# EAGLE board Varella_Std - v.1.0 (EAGLE 9.5.2)
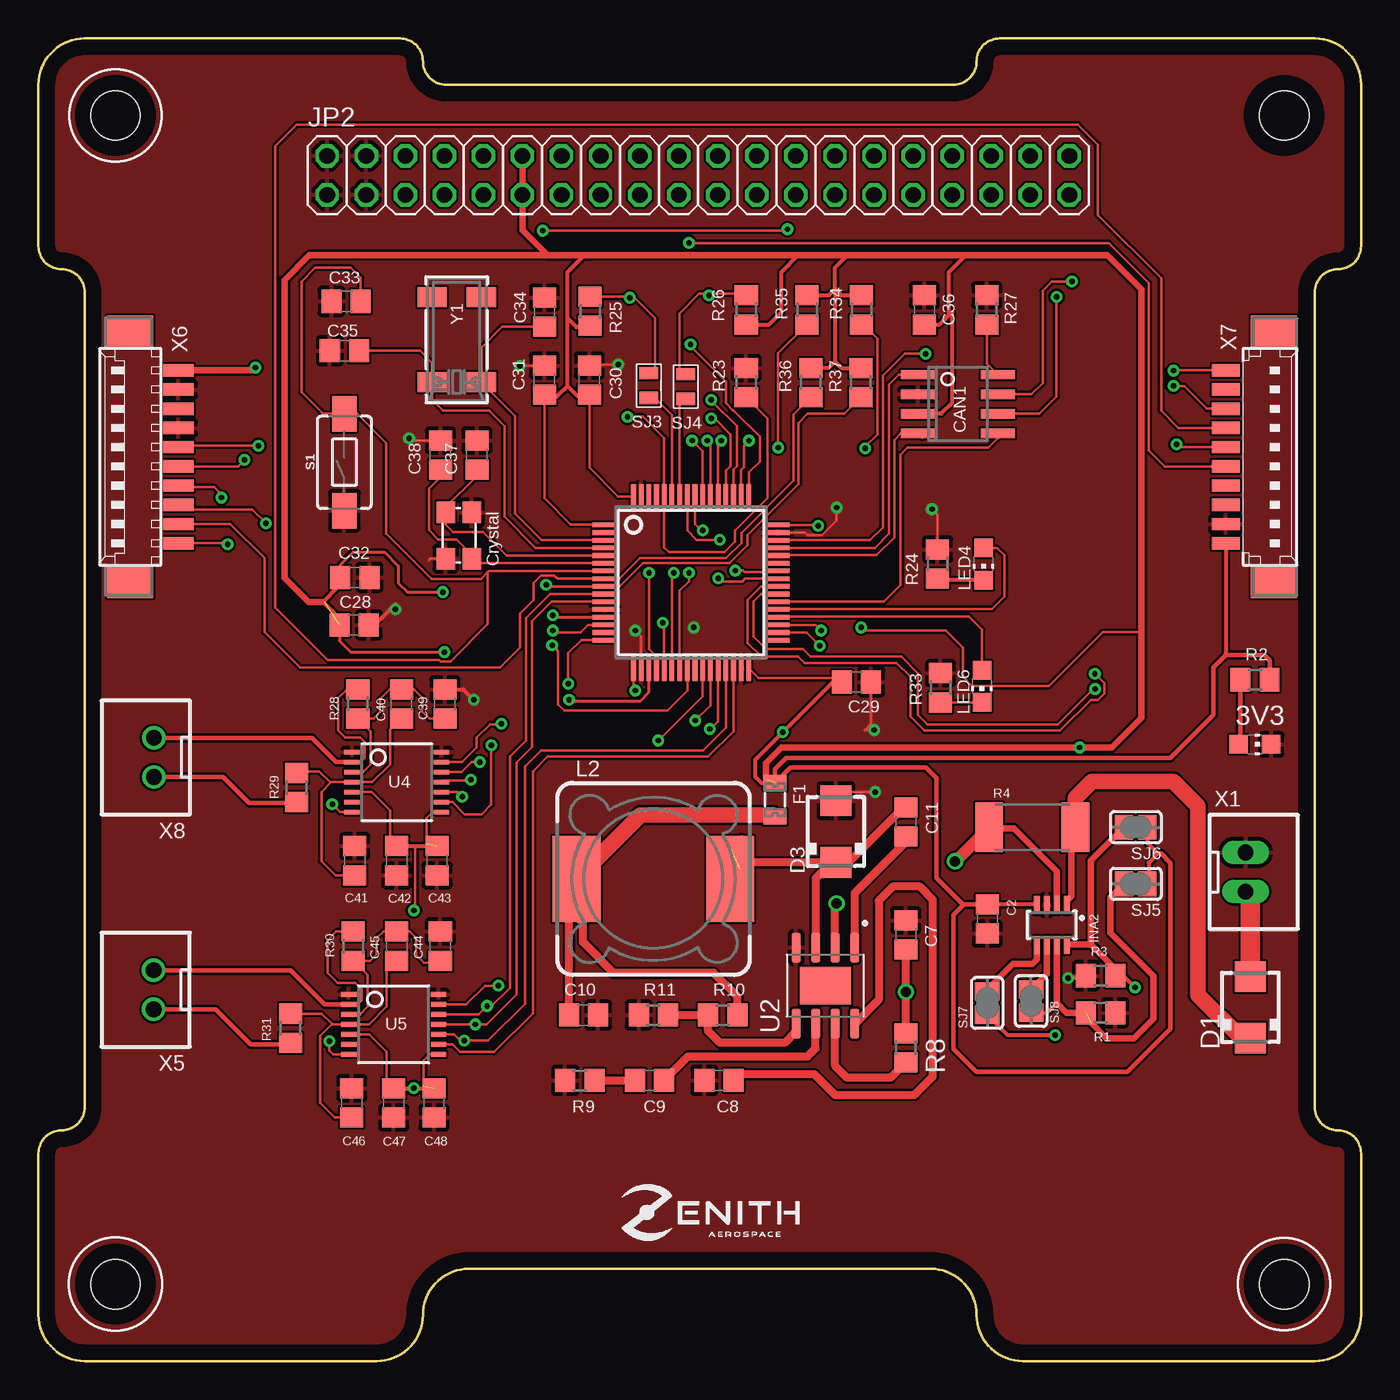
[diagram p0: board, top side]
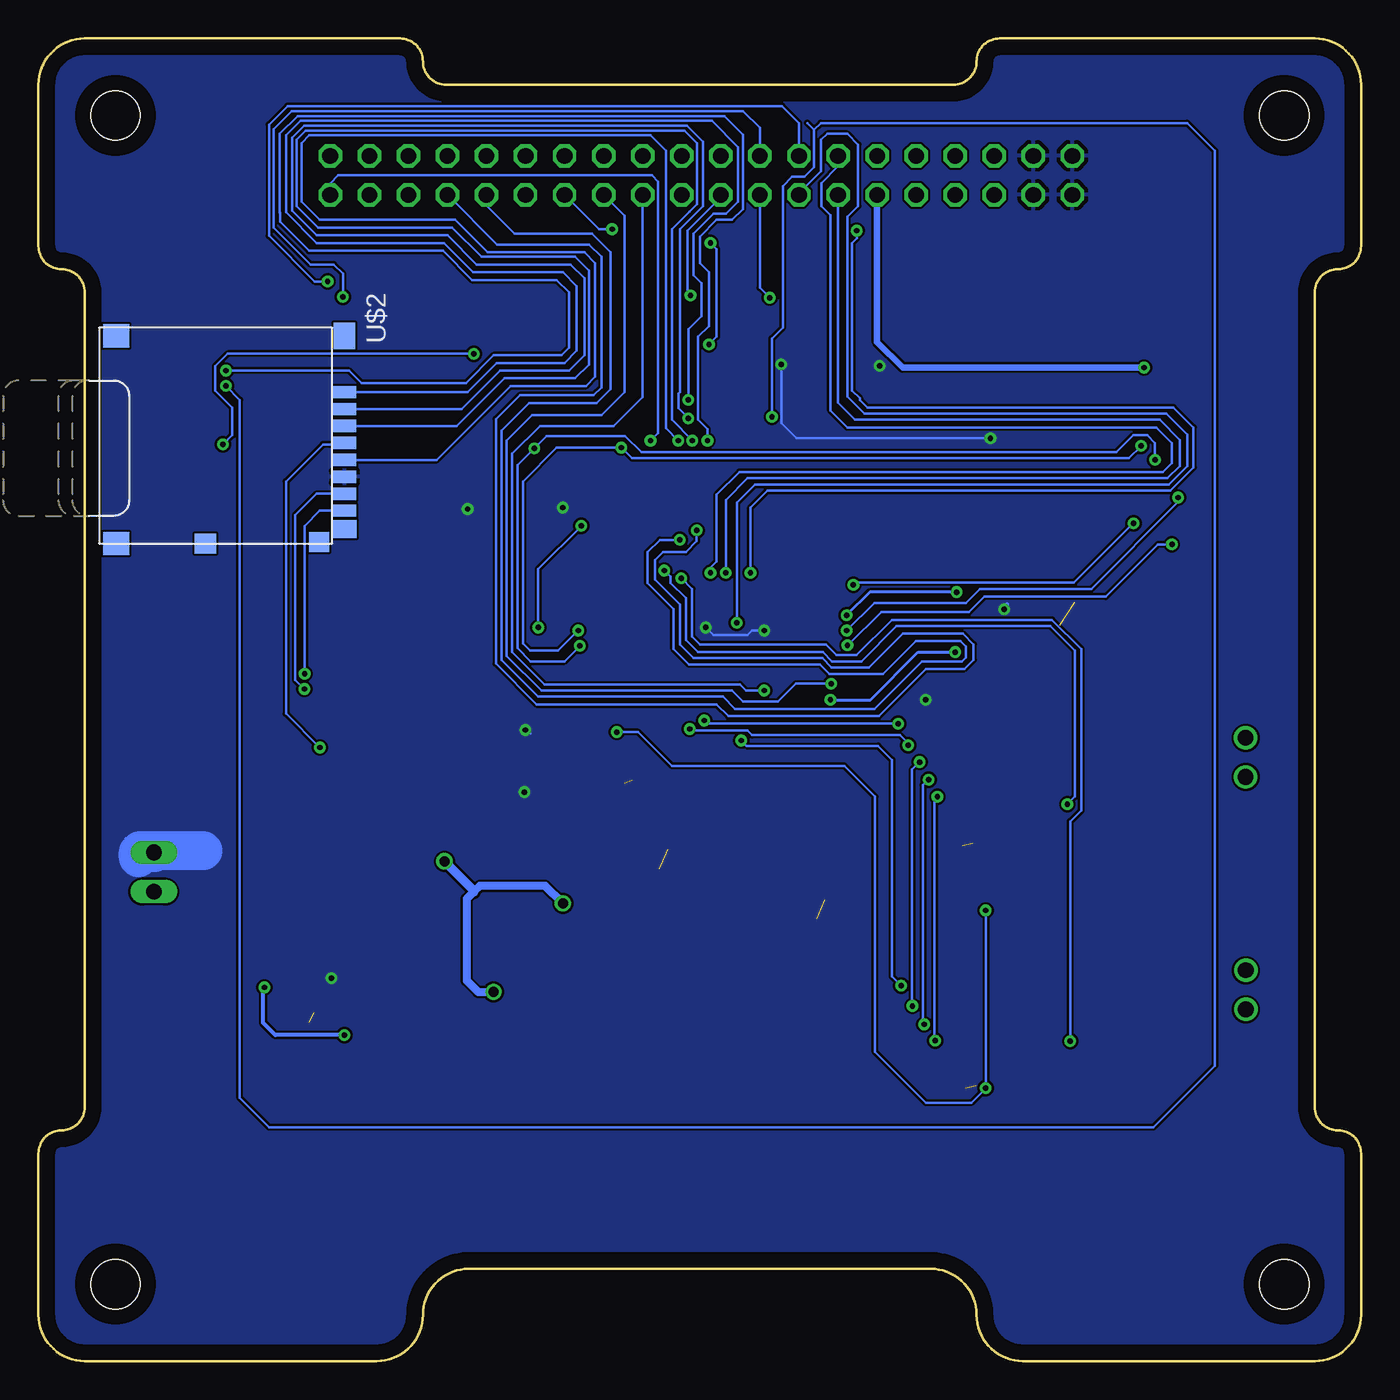
[diagram p1: board, bottom side, seen from below]

Size 86 x 86 mm. Coordinates in mm from the lower left corner, seen from the top.
Outline: 0,83 0,72.5 arc90 1.5,71 arc-90 3,69.5 3,16.5 arc-90 1.5,15 arc90 0,13.5 0,3 arc90 3,0 22,0 arc90 25,3 arc-90 28,6 58,6 arc-90 61,3 arc90 64,0 83,0 arc90 86,3 86,13.5 arc90 84.5,15 arc-90 83,16.5 83,69.5 arc-90 84.5,71 arc90 86,72.5 86,83 arc90 83,86 62.5,86 arc90 61,84.5 arc-90 59.5,83 26.5,83 arc-90 25,84.5 arc90 23.5,86 3,86 arc90 0,83
Copper layers (1*16): Top 0.035mm / dielectric 1.5mm / Bottom 0.035mm
Design rules "default": minimum track width 6mil, minimum drill 0.35mm, track to track 6mil, track to pad 6mil, pad to pad 6mil, via to via 6mil, smd to smd 6mil, copper to edge 40mil, drill to drill 6mil, minimum pad ring 10mil, minimum via ring 8mil, stop-mask expansion 4mil, vias tented up to drill 0mil, thermal gap 10mil
Holes 3.2 mm at 5,5 81,5 81,81 5,81

## Footprints (pad centres in the part's own frame; a part is rotated, then mirrored left to right if it is on the bottom)
CHIP-LED0805 = smd 1.2 x 1.2: A 0,-1.05; C 0,1.05
C0805 = smd 1.3 x 1.5: 1 -0.95,0; 2 0.95,0
SOIC8 = smd 0.6 x 2.2: 1 -1.905,-2.6; 2 -0.635,-2.6; 3 0.635,-2.6; 4 1.905,-2.6; 5 1.905,2.6; 6 0.635,2.6; 7 -0.635,2.6; 8 -1.905,2.6
LQFP64_10X10 = smd 0.3 x 1.6: 1 -3.75,-5.6; 2 -3.25,-5.6; 3 -2.75,-5.6; 4 -2.25,-5.6; 5 -1.75,-5.6; 6 -1.25,-5.6; 7 -0.75,-5.6; 8 -0.25,-5.6; 9 0.25,-5.6; 10 0.75,-5.6; 11 1.25,-5.6; 12 1.75,-5.6; 13 2.25,-5.6; 14 2.75,-5.6; 15 3.25,-5.6; 16 3.75,-5.6; 33 3.75,5.6; 34 3.25,5.6; 35 2.75,5.6; 36 2.25,5.6; 37 1.75,5.6; 38 1.25,5.6; 39 0.75,5.6; 40 0.25,5.6; 41 -0.25,5.6; 42 -0.75,5.6; 43 -1.25,5.6; 44 -1.75,5.6; 45 -2.25,5.6; 46 -2.75,5.6; 47 -3.25,5.6; 48 -3.75,5.6 | smd 1.6 x 0.3: 17 5.6,-3.75; 18 5.6,-3.25; 19 5.6,-2.75; 20 5.6,-2.25; 21 5.6,-1.75; 22 5.6,-1.25; 23 5.6,-0.75; 24 5.6,-0.25; 25 5.6,0.25; 26 5.6,0.75; 27 5.6,1.25; 28 5.6,1.75; 29 5.6,2.25; 30 5.6,2.75; 31 5.6,3.25; 32 5.6,3.75; 49 -5.6,3.75; 50 -5.6,3.25; 51 -5.6,2.75; 52 -5.6,2.25; 53 -5.6,1.75; 54 -5.6,1.25; 55 -5.6,0.75; 56 -5.6,0.25; 57 -5.6,-0.25; 58 -5.6,-0.75; 59 -5.6,-1.25; 60 -5.6,-1.75; 61 -5.6,-2.25; 62 -5.6,-2.75; 63 -5.6,-3.25; 64 -5.6,-3.75
SMA = smd 2 x 2: A 2,0; C -2,0
0805L = smd 1 x 1.5: 1 -1.1,0; 2 1.1,0
SOT23-8 = smd 0.4 x 1.2: 1 -0.975,-1.3; 2 -0.325,-1.3; 3 0.325,-1.3; 4 0.975,-1.3; 5 0.975,1.3; 6 0.325,1.3; 7 -0.325,1.3; 8 -0.975,1.3
2X20 = drill 1.016 octagon: 1 -24.13,-1.27; 2 -24.13,1.27; 3 -21.59,-1.27; 4 -21.59,1.27; 5 -19.05,-1.27; 6 -19.05,1.27; 7 -16.51,-1.27; 8 -16.51,1.27; 9 -13.97,-1.27; 10 -13.97,1.27; 11 -11.43,-1.27; 12 -11.43,1.27; 13 -8.89,-1.27; 14 -8.89,1.27; 15 -6.35,-1.27; 16 -6.35,1.27; 17 -3.81,-1.27; 18 -3.81,1.27; 19 -1.27,-1.27; 20 -1.27,1.27; 21 1.27,-1.27; 22 1.27,1.27; 23 3.81,-1.27; 24 3.81,1.27; 25 6.35,-1.27; 26 6.35,1.27; 27 8.89,-1.27; 28 8.89,1.27; 29 11.43,-1.27; 30 11.43,1.27; 31 13.97,-1.27; 32 13.97,1.27; 33 16.51,-1.27; 34 16.51,1.27; 35 19.05,-1.27; 36 19.05,1.27; 37 21.59,-1.27; 38 21.59,1.27; 39 24.13,-1.27; 40 24.13,1.27
SRR1280 = smd 5.6 x 3.1: 1 0.635,5; 2 0.635,-5
R0805 = smd 1.3 x 1.5: 1 -0.95,0; 2 0.95,0
R2512 = smd 1.8 x 3.2: 1 -2.8,0; 2 2.8,0
TACTILE_SWITCH_SMD_6.0X3.5MM = smd 2.3 x 1.6: 1 -3.15,0; 2 3.15,0
SMD-JUMPER-2 = smd 0.8 x 1.2: 1 -0.8,0; 2 0.8,0
SOLDERJUMPER_REFLOW_NOPASTE = smd 1.168 x 1.6: 1 -0.762,0; 2 0.762,0
SOIC127P600X170-9N = smd 1.97 x 0.6: 1 -2.475,1.905; 2 -2.475,0.635; 3 -2.475,-0.635; 4 -2.475,-1.905; 5 2.475,-1.905; 6 2.475,-0.635; 7 2.475,0.635; 8 2.475,1.905 | smd 2.41 x 3.3: 9 0,0
TSSOP14 = smd 0.305 x 0.991: 1 -1.95,-2.918; 2 -1.3,-2.918; 3 -0.65,-2.918; 4 0,-2.918; 5 0.65,-2.918; 6 1.3,-2.918; 7 1.95,-2.918; 8 1.95,2.918; 9 1.3,2.918; 10 0.65,2.918; 11 0,2.918; 12 -0.65,2.918; 13 -1.3,2.918; 14 -1.95,2.918
MOLEX-502774-0891-MICROSD = smd 0.8 x 1.5: 1 -3.3,8.2; 2 -2.2,8.2; 3 -1.1,8.2; 4 0,8.2; 5 1.1,8.2; 6 2.2,8.2; 7 3.3,8.2; 8 4.4,8.2 | smd 1.29 x 1.3: 9 6.455,6.55 | smd 1.29 x 1.4: 10 6.54,-0.85 | smd 1.5 x 1.7: 11 6.54,-6.65; 12 -6.96,-6.65 | smd 1.7 x 1.4: 14 -6.96,8.2 | smd 1.2 x 1.6: 15 5.6,8.2
CRYSTAL_SMD = smd 1.4 x 1.2: P$1 0,1.7; P$2 3,1.7; P$3 0,0; P$4 3,0
JST-XH-02-PACKAGE-LONG-PAD = drill 1.016 long: 1 -1.27,0; 2 1.27,0
JST-XH-02-PACKAGE-ROUND-PAD = drill 1.016: 1 -1.27,0; 2 1.27,0
53261-10 = smd 0.8 x 2: 1 5.625,-2.5; 2 4.375,-2.5; 3 3.125,-2.5; 4 1.875,-2.5; 5 0.625,-2.5; 6 -0.625,-2.5; 7 -1.875,-2.5; 8 -3.125,-2.5; 9 -4.375,-2.5; 10 -5.625,-2.5 | smd 2.1 x 3: S1 8.125,0.625; S2 -8.125,0.625
53398-10 = smd 0.8 x 1.8: 1 5.625,-2.5; 2 4.375,-2.5; 3 3.125,-2.5; 4 1.875,-2.5; 5 0.625,-2.5; 6 -0.625,-2.5; 7 -1.875,-2.5; 8 -3.125,-2.5; 9 -4.375,-2.5; 10 -5.625,-2.5 | smd 2.1 x 3: S1 8.125,0.625; S2 -8.125,0.625
CRYSTAL_8X3.8 = smd 1.3 x 1.9: P$1 -2.75,-1.6; P$2 2.75,-1.6; P$3 2.75,1.6; P$4 -2.75,1.6

## Placement (x,y rotation side)
3V3  [CHIP-LED0805]  79.1,40.1 270 top
C2  [C0805]  61.7,28.74 270 top
C7  10uF  [C0805]  56.4,27.71 90 top
C8  0.1uF  [C0805]  44.24,18.25 180 top
C9  3.9nF  [C0805]  39.73,18.25 180 top
C10  22uF  [C0805]  35.45,22.5 0 top
C11  10nF  [C0805]  56.4,35.05 270 top
C28  1nF  [C0805]  20.53,47.87 0 top
C29  1nF  [C0805]  53.2,44.16 0 top
C30  1nF  [C0805]  35.83,63.78 90 top
C31  1nF  [C0805]  32.9,63.78 90 top
C32  1nF  [C0805]  20.58,50.95 0 top
C33  100nF  [C0805]  20.01,68.91 0 top
C34  4.3pF  [C0805]  32.91,68.21 270 top
C35  4.3pF  [C0805]  19.9,65.69 0 top
C36  1nF  [C0805]  57.61,68.35 90 top
C37  [C0805]  28.51,58.91 90 top
C38  [C0805]  26.14,58.91 90 top
C39  0.01uF  [C0805]  26.43,42.73 270 top
C40  0.1uF  [C0805]  23.6,42.73 270 top
C41  0.01uF  [C0805]  20.57,32.54 90 top
C42  0.1uF  [C0805]  23.3,32.54 270 top
C43  0.1uF  [C0805]  25.92,32.54 270 top
C44  0.01uF  [C0805]  26.13,26.98 270 top
C45  0.1uF  [C0805]  23.3,26.98 270 top
C46  0.01uF  [C0805]  20.37,16.79 90 top
C47  0.1uF  [C0805]  23.1,16.79 270 top
C48  0.1uF  [C0805]  25.72,16.79 270 top
CAN1  SN65HVD233D  [SOIC8]  59.78,62.23 270 top
COMM_MICRO2  STM32L496RGT6  [LQFP64_10X10]  42.44,50.62 270 top
D1  S1M  [SMA]  78.8,23 90 top
D3  B130-13-F  [SMA]  51.85,34.43 90 top
F1  0805L010  [0805L]  47.9,36.5 270 top
INA2  INA219BIDCNT  [SOT23-8]  65.89,28.36 180 top
JP2  [2X20]  42.9,77.1 0 top
L2  SRR1280  [SRR1280]  39.99,31.99 270 top
LED4  [CHIP-LED0805]  61.45,51.83 180 top
LED6  [CHIP-LED0805]  61.35,43.88 180 top
R1  10K  [R0805]  69.06,22.64 180 top
R2  220  [R0805]  79.1,44.3 0 top
R3  10K  [R0805]  69.06,25.06 0 top
R4  0.1  [R2512]  64.62,34.71 0 top
R8  100K  [R0805]  56.4,20.37 90 top
R9  6.8K  [R0805]  35.2,18.25 0 top
R10  26.1K  [R0805]  44.49,22.5 0 top
R11  10K  [R0805]  39.98,22.5 0 top
R23  100k  [R0805]  46.02,63.63 90 top
R24  220  [R0805]  58.46,51.83 270 top
R25  4.7k  [R0805]  35.87,68.27 270 top
R26  4.7k  [R0805]  46.02,68.35 270 top
R27  100  [R0805]  61.66,68.35 270 top
R28  100  [R0805]  20.77,42.73 270 top
R29  100  [R0805]  16.79,37.29 90 top
R30  100  [R0805]  20.47,26.98 270 top
R31  100  [R0805]  16.39,21.64 90 top
R33  220  [R0805]  58.66,43.78 270 top
R34  4.7k  [R0805]  53.52,68.35 90 top
R35  4.7k  [R0805]  49.97,68.35 90 top
R36  4.7k  [R0805]  50.22,63.63 90 top
R37  4.7k  [R0805]  53.47,63.63 90 top
S1  MOMENTARY-SWITCH-SPST-SMD-6.0X3.5MM  [TACTILE_SWITCH_SMD_6.0X3.5MM]  19.89,58.44 90 top
SJ3  [SMD-JUMPER-2]  39.68,63.44 90 top
SJ4  [SMD-JUMPER-2]  42.08,63.37 90 top
SJ5  [SOLDERJUMPER_REFLOW_NOPASTE]  71.35,31.03 180 top
SJ6  [SOLDERJUMPER_REFLOW_NOPASTE]  71.35,34.71 180 top
SJ7  [SOLDERJUMPER_REFLOW_NOPASTE]  61.7,23.28 90 top
SJ8  [SOLDERJUMPER_REFLOW_NOPASTE]  64.55,23.41 90 top
U2  MP2307DN-LF-Z  [SOIC127P600X170-9N]  51.17,24.41 270 top
U4  MAX31856  [TSSOP14]  23.3,37.64 270 top
U5  MAX31856  [TSSOP14]  23.1,21.89 270 top
U$2  MOLEX-502774-0891-MICROSD  [MOLEX-502774-0891-MICROSD]  74.3,59.7 270 bottom
U$3  CRYSTAL  [CRYSTAL_SMD]  28.18,52.18 90 top
X1  JST-XH-02-PIN-LONG-PAD  [JST-XH-02-PACKAGE-LONG-PAD]  78.5,31.8 270 top
X5  JST-XH-02-PIN-ROUND-PAD  [JST-XH-02-PACKAGE-ROUND-PAD]  7.49,24.14 90 top
X6  53261-10  [53261-10]  6.6,58.8 90 top
X7  53398-10  [53398-10]  79.7,58.8 270 top
X8  JST-XH-02-PIN-ROUND-PAD  [JST-XH-02-PACKAGE-ROUND-PAD]  7.5,39.25 90 top
Y1  32768kHz  [CRYSTAL_8X3.8]  27.2,66.42 90 top

## Library data of the parts
3V3 LED4 LED6 = led
C2 C7-C11 C28-C48 = rcl; SPICEPREFIX: C
CAN1 = SN65HVD233D; AVAILABILITY: Unavailable; DESCRIPTION: 3.3V CAN Transceiver with Standby Mode, Loop-back 8-SOIC -40 to 125; MF: Texas Instruments; MP: SN65HVD233D; PACKAGE: SOIC-8 Texas Instruments; PRICE: None
COMM_MICRO2 = STM32L4xxx; FARNELL: 2725138; FLASH: 1024kB; SRAM: 320kB
D1 = diode
D3 = B130-13-F; AVAILABILITY: Unavailable; DESCRIPTION: Diode Schottky 30V 1A Surface Mount SMA; MF: Multicomp; MP: B130-13-F; PACKAGE: DO-214 Multicomp; PRICE: None
F1 = polyfuse-smd_10; MF: Littelfuse; MPN: 0805L010; OC_FARNELL: 1832100; OC_NEWARK: 18M4774
INA2 SJ5-SJ8 U4 U5 Y1 = microbuilder
JP2 = pinhead
L2 = inductor-bourns
R1-R3 R8-R11 R23-R31 R33-R37 = rcl; SPICEPREFIX: R
R4 = eagle-ltspice; SPICEMODEL: NONE; SPICEPREFIX: R
S1 = SparkFun-Switches; PROD_ID: SWCH-00815; SF_SKU: COM-08229
SJ3 SJ4 = FaBo-PIN
U2 = MP2307DN-LF-Z; AVAILABILITY: Unavailable; DESCRIPTION: Buck Switching Regulator IC Positive Adjustable 0.925V 1 Output 3A 8-SOIC _0.154, 3.90mm Width_ Exposed Pad; MF: Monolithic Power; MP: MP2307DN-LF-Z; PACKAGE: SOIC-8 Monolithic Power; PRICE: None
U$2 = Ava; FARNELL: 2064063
U$3 = cristal
X1 X5 X8 = JST-XH-Zenith
X6 = con-zenith; MF: MOLEX; OC_FARNELL: unknown; OC_NEWARK: unknown
X7 = con-molex; MF: MOLEX; MPN: 53398-1071; OC_FARNELL: unknown; OC_NEWARK: 59J0425

## Nets
5V: X6.3
!FAULT_1: COMM_MICRO2.27 U4.13
!FAULT_2: COMM_MICRO2.26 U5.13
+3V3: C2.1 C28.1 C29.1 C30.1 C31.1 C32.1 C36.1 C42.1 C43.1 C47.1 C48.1 CAN1.3 COMM_MICRO2.1 COMM_MICRO2.13 COMM_MICRO2.19 COMM_MICRO2.32 COMM_MICRO2.48 COMM_MICRO2.64 F1.1 INA2.4 JP2.11 JP2.12 R2.2 R25.2 R26.2 R34.2 R35.2 R36.2 R37.2 SJ5.1 SJ6.1 U4.5 U4.8 U5.5 U5.8 U$2.4 X6.1 X7.1
BOOT: COMM_MICRO2.60 R23.1 X7.8
CAN1_LBK: CAN1.5 COMM_MICRO2.38
CAN1_RX: CAN1.4 COMM_MICRO2.44
CAN1_TX: CAN1.1 COMM_MICRO2.45
CAN_H: CAN1.7 JP2.16
CAN_L: CAN1.6 JP2.18
CS_1: COMM_MICRO2.28 U4.9
CS_2: COMM_MICRO2.30 U5.9
CS_3: COMM_MICRO2.43
DIG1: COMM_MICRO2.57 JP2.31
DIG2: COMM_MICRO2.56 JP2.33
DIG5: COMM_MICRO2.50 JP2.39
DRDY_1: COMM_MICRO2.42 U4.7
DRDY_2: COMM_MICRO2.41 U5.7
DRDY_3: COMM_MICRO2.25
EP: U2.9
GEN_1: COMM_MICRO2.24 X6.10
GND: 3V3.C C2.2 C7.2 C8.2 C10.2 C28.2 C29.2 C30.2 C31.2 C32.2 C33.1 C34.1 C35.1 C36.2 C37.2 C38.2 C39.1 C41.2 C42.2 C43.2 C44.1 C46.2 C47.2 C48.2 CAN1.2 COMM_MICRO2.12 COMM_MICRO2.18 COMM_MICRO2.31 COMM_MICRO2.47 COMM_MICRO2.63 D3.A INA2.3 JP2.1 JP2.2 JP2.3 JP2.4 R1.1 R3.1 R9.1 R11.1 R23.2 R24.1 R27.1 R33.1 S1.1 U2.4 U4.1 U4.14 U5.1 U5.14 U$2.6 U$3.P$1 U$3.P$4 X1.1 X6.2 X6.4 X7.2
INA_IN: D1.C INA2.1 R4.2
INA_OUT: C7.1 INA2.2 R4.1 R8.2 U2.2
MCO: X7.9
MISO_BUS: COMM_MICRO2.22 JP2.13
MISO_SENSOR: COMM_MICRO2.10 U4.12 U5.12
MOSI_BUS: COMM_MICRO2.23 JP2.14
MOSI_SENSOR: COMM_MICRO2.11 U4.11 U5.11
N$1: D1.A X1.2
N$2: 3V3.A R2.1
N$3: U$2.10
N$4: U$2.9
N$7: INA2.8 R3.2 SJ6.2 SJ7.1
N$8: INA2.7 R1.2 SJ5.2 SJ8.1
N$9: INA2.5 SJ7.2
N$10: INA2.6 SJ8.2
N$13: R8.1 U2.7
N$14: C9.2 R9.2
N$15: C8.1 U2.8
N$16: C9.1 U2.6
N$17: C11.1 D3.C L2.1 U2.3
N$18: R10.1 R11.2 U2.5
N$19: C11.2 U2.1
N$25: COMM_MICRO2.37 LED4.A
N$26: LED4.C R24.2
N$27: C34.2 COMM_MICRO2.3 Y1.P$1
N$28: C35.2 COMM_MICRO2.4 Y1.P$4
N$29: COMM_MICRO2.59 SJ3.1
N$30: COMM_MICRO2.58 SJ4.1
N$31: CAN1.8 R27.2
N$34: COMM_MICRO2.36 LED6.A
N$35: LED6.C R33.2
NRST: C33.2 COMM_MICRO2.7 S1.2 X7.7
NSS_BUS: COMM_MICRO2.20 JP2.27
OSC_IN: C37.1 COMM_MICRO2.5 U$3.P$2
OSC_OUT: C38.1 COMM_MICRO2.6 U$3.P$3
OUT: C10.1 F1.2 L2.2 R10.2
PRESSURE_OUT: COMM_MICRO2.14 X6.7
SCL_2: COMM_MICRO2.34 R34.1 X6.6
SCL_3: COMM_MICRO2.8 R36.1 X6.9
SCL_BUS: JP2.19 R26.1 SJ4.2
SCLK_BUS: COMM_MICRO2.21 JP2.15
SCLK_SENSOR: COMM_MICRO2.29 U4.10 U5.10
SDA_2: COMM_MICRO2.35 R35.1 X6.5
SDA_3: COMM_MICRO2.9 R37.1 X6.8
SDA_BUS: JP2.17 R25.1 SJ3.2
SDMMC_CK: COMM_MICRO2.53 U$2.5
SDMMC_CMD: COMM_MICRO2.54 U$2.3
SDMMC_D0: COMM_MICRO2.39 U$2.7
SDMMC_D1: COMM_MICRO2.40 U$2.8
SDMMC_D2: COMM_MICRO2.51 U$2.1
SDMMC_D3: COMM_MICRO2.52 U$2.2
SS_EXT: COMM_MICRO2.33
SWCLK: COMM_MICRO2.49 X7.5
SWDIO: COMM_MICRO2.46 X7.6
SWO: COMM_MICRO2.55 X7.10
T1+: C40.2 C41.1 R29.2 U4.4
T1-: C39.2 C40.1 R28.2 U4.3
T2+: C45.2 C46.1 R31.2 U5.4
T2-: C44.2 C45.1 R30.2 U5.3
THERM1+: R29.1 X8.1
THERM1-: R28.1 U4.2 X8.2
THERM2+: R31.1 X5.1
THERM2-: R30.1 U5.2 X5.2
UART_RX: COMM_MICRO2.17 JP2.23
UART_TX: COMM_MICRO2.16 JP2.25

## Tracks (layer width: path | path; a pad name or v marks a point on that pad's centre or on a via)
!FAULT_1  (via drill 0.35)
  Top 0.152: U4.13 27.54,38.94 28.5,39.9 28.5,40.55 29.35,41.4 30.05,41.4 v30.1,41.45 | COMM_MICRO2.27 43.69,42.64 v42.7,41.65
  Bottom 0.152: v42.7,41.65 42.5,41.45 v30.1,41.45
!FAULT_2  (via drill 0.35)
  Top 0.152: v29.9,24.4 29.03,24.4 27.82,23.19 U5.13 | COMM_MICRO2.26 43.19,43.23 40.31,40.35 v40.3,40.35
  Bottom 0.152: v40.3,40.35 39.95,40 31.4,40 30.5,39.1 30.5,25 v29.9,24.4
+3V3  (via drill 0.35)  (4 unrouted)
  Top 0.152: 57.61,67.22 C36.1 | 58.11,67.4 C36.1 | C36.1 57.2,67.4 | C42.1 22.9,33.49 22.85,33.54 22.85,35.8 21.65,37 20.39,37 U4.5 | U4.8 25.64,35.69 25.25,35.3 25.25,33.65 | C47.1 22.7,17.74 22.65,17.79 22.65,20.1 21.51,21.24 U5.5 | U5.8 25.44,19.94 25.05,19.55 25.05,17.9 | COMM_MICRO2.64 37.69,56.23 35.83,58.09 C30.1 | C31.1 32.9,62.7 32.9,56.1 34.6,54.4 36.81,54.4 COMM_MICRO2.1 | 58.2,61.59 57.2,61.59 CAN1.3 | 53.2,69.3 R34.2 | 35.85,67.33 R25.2 | 46.76,67.4 R26.2 | COMM_MICRO2.32 46.81,44.4 52.01,44.4 C29.1 | COMM_MICRO2.48 50.62,54.38 v50.7,54.3 | v53.5,47.7 53.5,47.6 53.6,47.5 59,47.5 60.1,46.4 60.1,44.5 60.7,43.9 65.7,43.9 69.2,47.4 71.7,47.4 | 24.5,33.49 24.5,29.4 v24.4,29.3
  Top 0.2: C28.1 19.58,46.82 20.3,46.1 v26.4,46.1 | v34.5,43 34.6,42.9 39.1,42.9 39.69,43.49 COMM_MICRO2.19 | C32.1 19.63,51.75 20.48,52.6 22.5,52.6 23.4,51.7 23.4,50.6 24,50 v26.3,50 | v33.45,48.5 33.58,48.38 COMM_MICRO2.13
  Top 0.254: INA2.4 64.88,29.7 C2.1 | C47.1 v24.4,17.74 C48.1 | 47.3,37.9 47.4,37.8 | 51.8,69.7 51.8,71.1 52.6,71.9 | 51.8,69.7 51.8,65 | 51.8,65 51.38,64.58 R36.2 | 51.8,65 52.22,64.58 R37.2 | R35.2 51.4,69.3 51.8,69.7 | 51.8,69.7 52.2,69.3 53.2,69.3 | C36.1 58.6,67.4 59.2,68 | 59.2,68 59.4,68.2 59.4,62.3 58.7,61.59 57.2,61.59 | R26.2 47.5,67.4 48.3,68.2 48.3,70.8 49.4,71.9 | R25.2 35.77,67.22 34.98,67.22 34.4,67.8 | 34.4,67.8 34.4,70.8 35.5,71.9 35.9,71.9 | C30.1 35.73,62.73 35.07,62.73 34.4,63.4 | 32.9,62.7 33.7,62.7 34.4,63.4 | 34.4,63.4 34.4,67.8 | C42.1 24.5,33.49 C43.1 | SJ6.1 72.11,33.69 72.8,33 72.2,32.4 72.2,31.11 SJ5.1 | 19.12,50.72 19.35,50.95 19.5,50.95 | 19.5,50.95 C32.1 | C28.1 19.58,48.27 18.5,49.35 | 19.5,50.95 19.5,50.35 18.55,49.4 18.6,49.35 | 59.2,68 59.2,70.8 60.3,71.9 | X7.1 77.2,46 77.3,45.9 | C29.1 51.66,44.16 v48.4,40.9 46.6,39.1 46.6,38 47,37.6 F1.1
  Top 0.305: 72.8,33 73,33 73.6,32.4 73.6,21.6 70.8,18.8 61,18.8 59.5,20.3 59.5,29 60.15,29.65 | C2.1 60.2,29.7 60.15,29.65 | 60.15,29.65 58.4,31.4 58.4,37.9 57.7,38.6 48.9,38.6 F1.1 47.9,38.5 48.6,39.2 73.6,39.2 76.4,42 76.4,45.1 77.2,45.9 77.3,45.9 79.7,45.9 80.05,45.55 R2.2
  Top 0.406: 47.3,37.9 47.3,38.9 48.3,39.9 v67.7,39.9 69.8,39.9 71.7,41.8 71.7,47.4 71.7,69.7 69.5,71.9 60.3,71.9 52.6,71.9 49.4,71.9 35.9,71.9 33.1,71.9 31.47,73.53 JP2.11 JP2.12 | 35.5,71.9 17.6,71.9 16,70.3 16,50.9 17.55,49.35 18.5,49.35 | X6.1 13.93,64.42 v14.1,64.6
  Bottom 0.152: U$2.4 66.2,59.6 67.5,59.6 69.9,57.2 69.9,42.1 v67.7,39.9 | v50.7,54.3 53.5,51.5 v53.5,47.7 | v24.4,29.3 v24.4,17.74 25.34,16.8 28.3,16.8 31.6,20.1 31.6,36.7 33.6,38.7 44.8,38.7 47,40.9 v48.4,40.9
  Bottom 0.2: v26.4,46.1 28.8,46.1 31.9,43 v34.5,43 | v26.3,50 31.95,50 v33.45,48.5
  Bottom 0.406: v14.1,64.6 29.8,64.6 31.47,66.27 JP2.11
BOOT  (via drill 0.35)
  Top 0.152: 46.03,62.66 R23.1 47.4,61.3 47.4,56.1 45.3,54 45.3,53.3 44.6,52.6 41,52.6 40.69,52.91 COMM_MICRO2.60 40.69,60.01 39.3,61.4 v38.31,61.4 | X7.8 75.97,61.92 74.5,63.4 v73.8,63.4
  Bottom 0.152: v38.31,61.4 38.31,66.49 37.6,67.2 37.6,76.4 37,77 36.2,77 35.56,77.64 35.56,80.06 | 35.56,80.06 36,80.5 | 35.56,80.06 35.12,80.5 11.3,80.5 9.5,78.7 9.5,19.2 13.5,15.2 71,15.2 72.9,17.1 72.9,62.5 v73.8,63.4
CAN1_LBK
  Top 0.152: 62.35,60.35 CAN1.5 62.38,60.02 61.76,59.4 56.5,59.4 56.05,58.95 56.05,50.45 54.98,49.38 COMM_MICRO2.38
CAN1_RX
  Top 0.152: 56.73,60.33 CAN1.4 | CAN1.4 57.47,60.04 | CAN1.4 56.09,60.33 55.65,59.89 55.65,53.55 54.5,52.4 48.06,52.4 COMM_MICRO2.44
CAN1_TX
  Top 0.152: 56.45,64.14 CAN1.1 55.94,64.14 55.3,63.5 55.3,53.8 54.38,52.88 COMM_MICRO2.45 47.97,52.95
CAN_H  (via drill 0.35)
  Top 0.152: v67.2,70.2 65.9,70.2 65.3,69.6 65.3,63.6 64.56,62.87 CAN1.7
  Bottom 0.152: JP2.16 36.55,80.5 37.65,81.6 69.8,81.6 71,80.39 71,73.17 68.03,70.2 v67.2,70.2
CAN_L  (via drill 0.35)
  Top 0.152: 63.37,61.59 CAN1.6 65.09,61.59 66.2,62.7 v66.2,69.2
  Bottom 0.152: v66.2,69.2 66.2,70.7 66.8,71.3 68.3,71.3 70.7,73.7 70.7,80.1 69.53,81.28 40.17,81.28 39.09,80.19 JP2.18
CS_1  (via drill 0.35)
  Top 0.152: U4.9 26.92,36.34 27.72,35.54 28.8,35.54 29.44,36.18 v29.44,40.05 | v43.65,41.1 43.7,41.1 44.2,41.6 COMM_MICRO2.28
  Bottom 0.152: v43.65,41.1 43.55,41 39.9,41 39.6,40.7 30,40.7 29.44,40.14 v29.44,40.05
CS_2
  Top 0.152: U5.9 26.92,20.59 27.42,20.09 29.63,20.09 32.15,22.61 32.15,38.35 33.1,39.3 43.55,39.3 45.19,40.94 COMM_MICRO2.30
DIG1  (via drill 0.35)
  Top 0.152: v44.3,53.4 42.8,53.4 42.19,54.01 COMM_MICRO2.57
  Bottom 0.152: JP2.31 56.87,75.13 55.04,73.3 50,73.3 48.8,72.1 48.8,63.2 49.7,62.3 54.1,62.3 55.9,60.5 55.9,45.6 53.5,43.2 41.5,43.2 40.69,42.39 31.66,42.39 28.56,45.49 25.95,45.49 25.69,45.75 25.69,46.45 26.05,46.81 28.96,46.81 31.08,44.68 34.58,44.68 35.2,45.3 43.7,45.3 44.7,46.3 44.7,48.9 46.4,50.6 46.4,52.6 45.6,53.4 v44.3,53.4
DIG2  (via drill 0.35)
  Top 0.152: v43.2,54.01 43.09,54.01 42.69,54.41 COMM_MICRO2.56
  Bottom 0.152: JP2.33 56.18,72.6 50.2,72.6 49.4,71.8 49.4,63.3 49.9,62.8 54.7,62.8 56.25,61.25 56.25,45.35 53.6,42.7 41.9,42.7 41.14,41.94 31.36,41.94 28.3,45 25.8,45 25.2,45.6 25.2,46.6 25.9,47.3 29.8,47.3 32,45.1 34.43,45.1 35.03,45.7 43.4,45.7 44.3,46.6 44.3,49.2 45.91,50.81 45.91,51.65 45.9,51.66 45.9,52.1 45.4,52.6 43.91,52.6 43.2,53.31 v43.2,54.01 v43.2,54
DIG5  (via drill 0.35)
  Top 0.152: v46.2,59.85 45.89,59.54 45.89,58.12 45.69,57.92 COMM_MICRO2.50
  Bottom 0.152: v46.2,59.85 45.7,60.35 45.7,76.7 46.1,77.1 66.5,77.1 67.03,76.57 JP2.39
DRDY_1  (via drill 0.35)
  Top 0.152: U4.7 19.61,35.69 v19.1,36.2 | v45.3,51.4 45.8,51.4 45.9,51.3 47.97,51.3 COMM_MICRO2.42
  Bottom 0.152: v19.1,36.2 18.6,36.7 18.6,46.2 20.2,47.8 30.2,47.8 32.5,45.5 34.4,45.5 35,46.1 43.1,46.1 43.9,46.9 43.9,49.6 44.9,50.6 44.9,51 v45.3,51.4 45.19,51.4
DRDY_2  (via drill 0.35)
  Top 0.152: U5.7 19.17,19.94 18.91,20.2 v18.91,20.8 | COMM_MICRO2.41 45.94,50.88 45.77,50.7 44.4,50.7 v44.2,50.9
  Bottom 0.152: v18.91,20.8 18.91,35.09 18.2,35.8 18.2,46.3 20.1,48.2 30.5,48.2 32.8,45.9 34.1,45.9 34.8,46.6 43,46.6 43.5,47.1 43.5,50.2 v44.2,50.9
GEN_1  (via drill 0.35)
  Top 0.152: X6.10 12.22,53.17 v12.3,53.1 | COMM_MICRO2.24 42.19,43.59 40.9,42.3 34.96,42.3 34.95,42.29 34.21,42.29 33.8,42.7 33.8,46.15 33.73,46.23 v33.4,46.55
  Bottom 0.152: v12.3,53.1 13.2,53.1 16.6,49.7 24.5,49.7 25.5,48.7 31.2,48.7 33.35,46.55 v33.4,46.55
GND  (via drill 0.35)
  Top 0.152: U$3.P$1 25.48,52.18 25.4,52.1 | C31.2 31.33,64.73 v31.3,64.7 | C30.2 35.89,64.8 v37.7,64.8 | C38.2 24.25,59.85 v24.1,60 | COMM_MICRO2.18 39.19,47.11 v38.8,47.5 | COMM_MICRO2.47 49.83,53.88 50.01,53.69 50.95,53.69 51.9,54.64 v51.9,55.5 | R24.1 58.46,55.04 v58.1,55.4 | D3.A 52.42,37 v54.4,37 | C29.2 54.15,41.45 53.73,41.03 v54.35,41.03
  Top 0.254: R3.1 67.96,24.9 v66.95,24.9 | C39.1 27.62,43.68 v28.3,43 | C28.2 21.86,47.87 23.2,49.2 v23.2,48.89
  Bottom 0.152: v24.1,60 36.7,60 37.7,61 v37.7,64.8 | v38.8,47.5 39.6,47.5 39.9,47.2 42.1,47.2 v42.6,47.7 | v54.35,41.03 54.23,41.03 54,40.8
  Bottom 0.254: v66.95,24.9 66.9,24.9 | v23.2,48.89 23,49.09 23,49.2
  Bottom 2.54: X1.1 79.13,33.07 79.49,32.71 79.5,32.71 79.5,33.1 79.4,33.2 75.3,33.2
  pour Top: 64,0 83,0 arc90 86,3 86,13.5 arc90 84.5,15 arc-90 83,16.5 83,69.5 arc-90 84.5,71 arc90 86,72.5 86,83 arc90 83,86 62.5,86 arc90 61,84.5 arc-90 59.5,83 26.5,83 arc-90 25,84.5 arc90 23.5,86 3,86 arc90 0,83 0,72.5 arc90 1.5,71 arc-90 3,69.5 3,16.5 arc-90 1.5,15 arc90 0,13.5 0,3 arc90 3,0 22,0 arc90 25,3 arc-90 28,6 58,6 arc-90 61,3 arc90
  pour Bottom: 64,0 83,0 arc90 86,3 86,13.5 arc90 84.5,15 arc-90 83,16.5 83,69.5 arc-90 84.5,71 arc90 86,72.5 86,83 arc90 83,86 62.5,86 arc90 61,84.5 arc-90 59.5,83 26.5,83 arc-90 25,84.5 arc90 23.5,86 3,86 arc90 0,83 0,72.5 arc90 1.5,71 arc-90 3,69.5 3,16.5 arc-90 1.5,15 arc90 0,13.5 0,3 arc90 3,0 22,0 arc90 25,3 arc-90 28,6 58,6 arc-90 61,3 arc90
INA_IN
  Top 0.406: INA2.1 66.86,29.91 67.16,30.2 67.16,34.45 R4.2
  Top 1.016: D1.C 78.2,21 75.4,23.8 75.4,36.1 73.8,37.7 68.5,37.7 67.42,36.62 R4.2
INA_OUT  (via drill 0.65)
  Top 0.406: INA2.2 66.22,31.84 63.42,34.64 61.65,34.64 61.72,34.71 R4.1
  Top 0.508: R8.2 v56.4,24 C7.1 | U2.2 51.8,29.66 v51.9,29.75
  Top 0.813: R4.1 v59.61,32.5
  Top 1.016: v59.61,32.5 v59.6,32.5
  Bottom 0.508: v51.9,29.75 53.05,30.9 57.3,30.9 57.7,30.5 58.15,30.05 58.15,24.75 57.4,24 v56.4,24
  Bottom 0.61: v59.6,32.5 57.7,30.6 57.7,30.5
MISO_BUS  (via drill 0.35)
  Top 0.152: v41.3,51.25 41.2,51.15 41.2,45.03 COMM_MICRO2.22
  Bottom 0.152: JP2.13 34.01,62.31 32.9,61.2 13.1,61.2 11.8,59.9 11.8,58.2 12.6,57.4 39.9,57.4 41.3,56 v41.3,51.25
MISO_SENSOR  (via drill 0.35)
  Top 0.152: COMM_MICRO2.10 33.27,49.88 31.7,48.3 31.7,40.36 30.65,39.31 30.65,24.27 29.47,23.09 v29.17,23.09 28.62,22.54 U5.12 | v28.7,38.95 28.15,38.95 27.5,38.3 U4.12
  Bottom 0.152: v29.17,23.09 29.19,23.11 29.19,38.46 v28.7,38.95
MOSI_BUS  (via drill 0.35)
  Top 0.152: COMM_MICRO2.23 41.69,50.09 42.3,50.7 v42.3,51.25
  Bottom 0.152: JP2.14 34.01,77.69 35.1,76.6 35.1,75.1 34.5,74.5 34.5,61.8 33.4,60.7 13.3,60.7 12.3,59.7 12.3,58.4 12.89,57.8 40.43,57.8 41.91,56.33 41.91,51.99 42.3,51.6 v42.3,51.25
MOSI_SENSOR  (via drill 0.35)
  Top 0.152: COMM_MICRO2.11 33.38,49.38 32.1,48.1 32.1,39.93 31.1,38.93 31.1,23.85 29.14,21.89 v28.4,21.89 U5.11 | v28.11,37.79 28.11,37.74 26.32,37.74 U4.11
  Bottom 0.152: v28.4,21.89 28.4,21.99 28.5,22.09 28.5,37.45 28.16,37.79 v28.11,37.79
N$1
  Top 1.27: X1.2 78.8,30.23 D1.A
N$2
  Top 0.305: R2.1 78.15,40.2 3V3.A
N$7  (via drill 0.35)
  Top 0.254: SJ7.1 63.02,21.2 v66.1,21.2 | v71.3,24.3 70.54,25.06 R3.2
  Top 0.406: R3.2 69.7,25.37 69.7,25.82 68.43,27.09 | INA2.8 66.89,27.09 68.43,27.09 | SJ6.2 68.43,32.55 68.43,27.09
  Bottom 0.254: v66.1,21.2 70.6,21.2 71.4,22 71.4,24.2 v71.3,24.3
N$8  (1 unrouted)
  Top 0.254: SJ8.1 65.58,22.64 66.22,23.27
  Top 0.406: SJ5.2 69.7,30.14 69.7,27.85 72.49,25.06 72.49,22.26 71.22,20.99 69.45,20.99 68.43,22.01 | INA2.7 66.22,23.27 66.84,22.64 R1.2
N$9
  Top 0.406: INA2.5 64.92,26.11 64.62,25.82 63.35,25.82 61.7,24.17 SJ7.2
N$10
  Top 0.406: INA2.6 65.56,25.19 SJ8.2
N$13
  Top 0.508: R8.1 55.4,18.42 52.58,18.42 51.8,19.2 U2.7
N$14
  Top 0.508: R9.2 C9.2
N$15
  Top 0.508: C8.1 45.59,18.65 50.45,18.65 51.8,17.3 56.95,17.3 58.15,18.5 58.15,30 57.3,30.85 55.55,30.85 54.65,29.95 54.65,23.51 U2.8
N$16
  Top 0.508: U2.6 50.53,20.32 50.02,19.8 42.23,19.8 C9.1
N$17  (1 unrouted)
  Top 0.508: 45.62,31.99 L2.1 44.99,31.91 44.47,32.43 D3.C | C11.1 56.3,35.9 56.15,35.9 52.68,32.43 D3.C | D3.C 51.58,32.43 50.53,31.39 U2.3
  Top 0.61: 45.07,33.26 45.7,33.9
N$18
  Top 0.508: R11.2 R10.1 43.55,21.45 44.3,20.7 48.53,20.7 49.27,21.43 U2.5 49.27,22.64
N$19
  Top 0.508: U2.1 53.08,30.43 56.4,33.75 C11.2
N$25
  Top 0.152: LED4.A 62.32,52.88 62.8,52.4 62.8,49.7 62,48.9 48.06,48.9 COMM_MICRO2.37
N$26
  Top 0.152: 58.56,50.78 R24.2
  Top 0.254: LED4.C 58.56,50.78
N$27
  Top 0.152: C34.2 30.16,67.26 28.8,65.9 Y1.P$1 31,61.46 31,55.1 32.73,53.38 COMM_MICRO2.3
N$28
  Top 0.152: C35.2 24.8,65.69 25.59,64.91 Y1.P$4 25.59,62.51 26.3,61.8 29.3,61.8 30.3,60.8 30.3,54.9 32.33,52.88 COMM_MICRO2.4
N$29
  Top 0.152: COMM_MICRO2.59 41.19,61.51 40.06,62.63 SJ3.1
N$30
  Top 0.152: 42.06,62.57 SJ4.1 41.69,62.19 COMM_MICRO2.58
N$31
  Top 0.152: 61.8,64.14 CAN1.8 61.66,64.86 R27.2
N$34
  Top 0.152: LED6.A 61.35,47.55 60.5,48.4 48.06,48.4 COMM_MICRO2.36
N$35
  Top 0.152: LED6.C R33.2
NRST
  Top 0.152: 20.37,61.59 S1.2 | C33.2 20.96,70.44 20.3,71.1 18,71.1 17.1,70.2 17.1,63 18.51,61.59 S1.2 | COMM_MICRO2.7 33.67,51.38 29.3,51.38 29.21,51.29 | 29.21,51.29 28.77,50.85 25.55,50.85 22.6,53.8 22.6,59.7 20.71,61.59 S1.2 | X7.7 74.12,60.67 73,61.8 73,70.4 68.9,74.5 68.9,79.1 67.6,80.4 16.8,80.4 15.41,79.01 15.41,48.99 18.8,45.6 26.04,45.6 26.15,45.49 26.79,45.49 29.21,47.91 29.21,51.29
NSS_BUS  (via drill 0.35)
  Top 0.152: COMM_MICRO2.20 40.17,45.05 40.17,45.82 39.7,46.29 v39.7,51.25 | v48.7,73.6 48.6,73.5 v32.79,73.5
  Bottom 0.152: v39.7,51.25 39.7,55.5 38.6,56.6 12.4,56.6 10.9,58.1 10.9,60.7 12.2,62 32.1,62 32.6,62.5 32.6,62.6 33.09,63.09 33.09,72.7 32.79,73.01 v32.79,73.5 | JP2.27 49.56,73.6 v48.7,73.6
OSC_IN
  Top 0.152: C37.1 28.51,57.55 26.48,55.52 U$3.P$2 26.48,54.38 26.95,53.9 28.9,53.9 30.43,52.38 COMM_MICRO2.5
OSC_OUT
  Top 0.152: C38.1 26.13,57.95 26.13,57.45 25.4,56.73 25.4,54.02 25.98,53.43 27.18,53.43 28.18,52.43 28.18,52.3 | U$3.P$3 28.18,52.3 | COMM_MICRO2.6 28.6,51.88 28.18,52.3
OUT  (1 unrouted)
  Top 0.152: 35.4,28.2 34.99,28.61 L2.2
  Top 0.508: C10.1 34.5,29.6 34.9,30 | R10.2 45.45,23.7 43.9,25.25 37.4,25.25 35.4,27.25 35.4,28.2 35.4,28.75
  Top 1.016: F1.2 47.8,35.5 39.13,35.5 L2.2
PRESSURE_OUT  (via drill 0.35)
  Top 0.152: COMM_MICRO2.14 35.74,47.88 35.24,47.38 33.58,47.38 v33.45,47.5 | v11.9,56.15 11.9,56.35 11.43,56.83 9.2,56.83 X6.7
  Bottom 0.152: v33.45,47.5 31.65,49.3 25.7,49.3 24.8,50.2 17.55,50.2 11.9,55.85 v11.9,56.15
SCL_2  (via drill 0.35)
  Top 0.152: COMM_MICRO2.34 49.92,47.38 v50.8,46.5 | v13.4,58.6 12.97,58.17 X6.6 | R34.1 53.62,67.4 54.55,66.47 54.55,60.25 53.75,59.45 v53.75,59.35
  Bottom 0.152: v50.8,46.5 51.8,45.5 54,45.5 54.85,46.35 54.85,58.25 v53.75,59.35 52.95,60.15 47.85,60.15 46.8,59.1 15.9,59.1 14.8,60.2 13.9,60.2 13.4,59.7 v13.4,58.6
SCL_3
  Top 0.152: X6.9 12.47,54.42 14.7,52.2 14.7,47.4 17,45.1 30,45.1 31.3,46.41 31.3,48.6 32.2,49.49 32.2,50.59 32.68,51.08 33.54,51.08 33.74,50.88 COMM_MICRO2.8 37.77,50.88 39.1,52.2 44.7,52.2 45.7,53.2 45.7,53.85 49.1,57.25 49.1,61.55 R36.1
SCL_BUS  (via drill 0.35)
  Top 0.152: R26.1 45.92,69.4 43.6,69.4 | 43.6,69.4 v43.6,69.3 | 43.6,69.4 42.96,69.4 41.68,68.12 41.68,64.57 SJ4.2
  Bottom 0.152: JP2.19 41.67,75.83 41.7,75.86 41.7,75.6 43.8,73.5 43.8,69.5 v43.6,69.3
SCLK_BUS  (via drill 0.35)
  Top 0.152: COMM_MICRO2.21 40.69,47.9 v40.59,48
  Bottom 0.152: v40.59,48 40.59,55.81 39.4,57 12.5,57 11.3,58.2 11.3,60.23 12.67,61.6 32.3,61.6 33.4,62.7 33.4,74.4 32.7,75.1 32.7,79.1 33.4,79.8 34.7,79.8 35.1,79.4 35.1,77.38 36.55,75.93 JP2.15
SCLK_SENSOR  (via drill 0.35)
  Top 0.152: U5.10 27.02,21.24 27.47,20.79 27.65,20.79 v27.7,20.84 29.23,20.84 31.63,23.23 31.63,38.65 32.69,39.71 43.21,39.71 44.7,41.2 COMM_MICRO2.29 | v27.55,36.7 27.26,36.99 U4.10
  Bottom 0.152: v27.7,20.84 27.74,20.88 27.74,36.51 v27.55,36.7
SDA_2  (via drill 0.35)
  Top 0.152: COMM_MICRO2.35 50.52,47.88 v50.9,47.5 | v14.3,59.5 14.28,59.52 9.2,59.52 X6.5 | R35.1 48.1,65.53 v48.1,59.4
  Bottom 0.152: v50.9,47.5 52.2,46.2 54.05,46.2 54.5,46.65 54.5,57.2 52.3,59.4 v48.1,59.4 47.4,58.7 15.1,58.7 v14.3,59.5
SDA_3  (via drill 0.35)
  Top 0.152: X6.8 9.4,55.38 13.9,55.38 v14.8,54.48 14.8,54.7 | v33.01,50.47 33.1,50.38 COMM_MICRO2.9 37.77,50.38 39.3,51.9 44.93,51.9 46.1,53.07 46.1,53.72 49.41,57.02 49.41,61.01 50,61.6 52.4,61.6 R37.1
  Bottom 0.152: v14.8,54.48 18.67,50.61 32.87,50.61 v33.01,50.47
SDA_BUS  (via drill 0.35)
  Top 0.152: R25.1 38.37,69.22 v38.44,69.14 38.74,69.14 40.08,67.81 40.08,64.64 SJ3.2
  Bottom 0.152: JP2.17 39.09,69.79 v38.44,69.14
SDMMC_CK  (via drill 0.35)
  Top 0.152: v44.4,59.85 44.19,59.64 COMM_MICRO2.53
  Bottom 0.152: U$2.5 60.1,58.6 55.3,63.4 50.4,63.4 49.8,64 49.8,71.4 50.5,72.1 56.8,72.1 58.9,74.2 67.7,74.2 68.9,75.4 68.9,79.2 68.4,79.7 46.2,79.7 45.2,78.7 45.2,60.65 v44.4,59.85
SDMMC_CMD  (via drill 0.35)
  Top 0.152: v43.49,59.85 43.69,59.65 COMM_MICRO2.54
  Bottom 0.152: U$2.3 58.8,60.8 55.7,63.9 51.1,63.9 50.2,64.8 50.2,70.9 51.09,71.8 57.2,71.8 59.1,73.7 67.8,73.7 69.2,75.11 69.2,79.43 68.63,80 44.01,80 43.18,79.18 43.18,75.22 43.66,74.74 44.8,73.6 44.8,61.2 43.49,59.89 v43.49,59.85
SDMMC_D0  (via drill 0.35)
  Top 0.152: COMM_MICRO2.39 46.98,49.88 46.5,49.4 46.5,47.1 47.3,46.3 49.7,46.3 50.2,45.8 56.1,45.8 57.2,44.7 57.2,42 57.8,41.4 66.3,41.4 68.6,43.7 v68.7,43.7
  Bottom 0.152: v68.7,43.7 69.3,44.3 69.3,55 67.9,56.4 U$2.7
SDMMC_D1  (via drill 0.35)
  Top 0.152: COMM_MICRO2.40 46.98,50.38 46.1,49.5 46.1,46.7 47,45.8 49.4,45.8 49.8,45.4 55.8,45.4 56.7,44.5 56.7,41.9 57.6,40.99 66.43,40.99 68.43,43 68.9,43 69.31,43.41 69.31,44.09 v68.69,44.7
  Bottom 0.152: v68.69,44.7 68.69,54.31 67.7,55.3 U$2.8
SDMMC_D2  (via drill 0.35)
  Top 0.152: COMM_MICRO2.51 45.19,57.96 45.41,58.18 45.41,60.79 43.84,62.36 43.84,62.4 v43.74,62.5
  Bottom 0.152: v43.74,62.5 43.74,67.1 42.9,67.94 42.9,70.1 43.4,70.6 43.4,73.3 42.1,74.6 41.3,74.6 40.5,75.4 40.5,78.94 42.2,80.64 68.95,80.64 69.9,79.69 69.9,74.7 67.89,72.69 59.63,72.69 57.73,70.8 51.9,70.8 51,69.9 51,65.7 51.8,64.9 56.2,64.9 58.1,63 U$2.1
SDMMC_D3  (via drill 0.35)
  Top 0.152: v43.74,61.3 43.94,61.3 45.01,60.24 45.01,58.21 44.7,57.9 COMM_MICRO2.52
  Bottom 0.152: U$2.2 58.5,61.9 56,64.4 51.51,64.4 50.51,65.4 50.51,70.41 51.4,71.3 57.5,71.3 59.4,73.2 67.9,73.2 69.51,74.81 69.51,79.55 68.73,80.33 43.84,80.33 42.8,79.3 42.8,75.1 44.3,73.6 44.3,63 44.4,62.91 44.4,61.95 v43.74,61.3
SWCLK  (via drill 0.35)
  Top 0.152: X7.5 73.22,58.17 72.2,59.2 72.2,70.1 69.6,72.7 v42.3,72.7 | COMM_MICRO2.49 46.19,57.79 46.9,58.5 46.9,60.1 45.2,61.8 45.17,61.8 44.7,62.27 44.7,63.7 42.4,66 v42.4,66.1
  Bottom 0.152: v42.3,72.7 41.9,72.3 41.9,66.6 v42.4,66.1
SWDIO  (via drill 0.35)
  Top 0.152: X7.6 74.17,59.42 v74,59.6 | COMM_MICRO2.46 54.08,53.38 54.9,54.2 54.9,64.07 56.33,65.5 v57.7,65.5
  Bottom 0.152: v57.7,65.5 73.7,65.5 74.5,64.7 74.5,63.1 73.4,62 73.4,60.2 v74,59.6
SWO  (via drill 0.35)
  Top 0.152: COMM_MICRO2.55 43.19,59.16 v42.5,59.85 | v73.8,64.4 73.83,64.42 X7.10
  Bottom 0.152: v42.5,59.85 42.5,60.6 43.1,61.2 43.1,66.6 42.4,67.3 42.4,70.8 43,71.4 43,73.1 41.9,74.2 40.9,74.2 40.2,74.91 40.2,79.75 41.4,80.95 69.15,80.95 70.31,79.8 70.31,74.67 70.3,74.67 70.3,74.1 68.4,72.2 59.7,72.2 57.8,70.3 52.3,70.3 51.5,69.5 51.5,65.9 52,65.4 56.4,65.4 58.2,63.6 65,63.6 65.8,64.4 v73.8,64.4
T1+
  Top 0.152: C40.2 22.85,41.03 22.85,38.8 21.69,37.64 U4.4 19.16,37.64 19.04,37.64 | R29.2 16.89,38.34 18.26,38.34 18.96,37.64 19.04,37.64 | C41.1 19.31,31.59 18.4,32.5 18.4,37 19.04,37.64
T1-
  Top 0.152: U4.3 20.39,38.3 21.1,38.3 21.6,38.8 21.6,40.95 R28.2 21.78,41.78 22.2,42.2 22.2,43.05 22.83,43.68 C40.1 24.42,43.68 24.95,43.15 24.95,42.25 25.42,41.78 C39.2
T2+
  Top 0.152: C45.2 22.65,25.38 22.65,23.05 21.49,21.89 U5.4 19.11,21.89 19.09,21.91 | R31.2 18.41,22.59 19.09,21.91 | C46.1 19.26,15.84 18.3,16.8 18.3,21.13 19.09,21.91
T2-
  Top 0.152: U5.3 20.19,22.55 20.9,22.55 21.4,23.05 21.4,25.1 R30.2 21.58,26.03 22,26.45 22,27.5 22.43,27.93 C45.1 24.12,27.93 24.55,27.5 24.55,26.4 25.07,25.88 C44.2
THERM1+
  Top 0.305: X8.1 12.02,37.98 13.7,36.3 16.75,36.3 R29.1
THERM1-
  Top 0.152: R28.1 20.07,43.68 19.5,43.11 19.5,41 19.95,40.55 20.9,40.55 21.2,40.25 21.2,39.2 20.94,38.94 U4.2
  Top 0.305: U4.2 19.36,38.94 17.78,40.52 X8.2
THERM2+
  Top 0.305: X5.1 11.53,22.87 13.8,20.6 16.3,20.6 R31.1
THERM2-
  Top 0.152: R30.1 19.37,27.93 18.8,27.36 18.8,25.25 19.45,24.6 20.6,24.6 21,24.2 21,23.45 20.74,23.19 U5.2
  Top 0.305: X5.2 16.39,25.41 18.61,23.19 U5.2
UART_RX  (via drill 0.35)
  Top 0.152: v38.8,43.6 38.69,43.6 COMM_MICRO2.17
  Bottom 0.152: JP2.23 46.71,62.69 48.6,60.8 53.4,60.8 55.2,59 55.2,46.1 53.09,43.99 40.4,43.99 40,43.6 v38.8,43.6
UART_TX  (via drill 0.35)
  Top 0.152: COMM_MICRO2.16 36.81,46.9 35.3,46.9 34.45,46.05 v34.45,44.05
  Bottom 0.152: JP2.25 47.9,74.48 47.9,63 49.4,61.5 53.9,61.5 55.55,59.85 55.55,45.85 53.3,43.6 40.9,43.6 40.2,42.9 37.9,42.9 36.75,44.05 v34.45,44.05

## Text on the board
tNames: G:/Zenith/GENUS/Logo.bmp